# Altium PCB MGMEZZ04.PcbDoc (part 5 of 9)
Units mil, origin at the board's own origin, x right, y up, seen from the top; angles counter-clockwise.
Board outline 3790 x 5472.44 mil, 10 copper layers (TopLayer, InternalPlane1, MidLayer1, InternalPlane2, MidLayer2, MidLayer3, InternalPlane3, MidLayer4, InternalPlane4, BottomLayer), stack 57.08 mil thick; 846 components, 745 nets, 3323 pads, 1906 vias.
Unrouted connection lines stored in the file: 128.
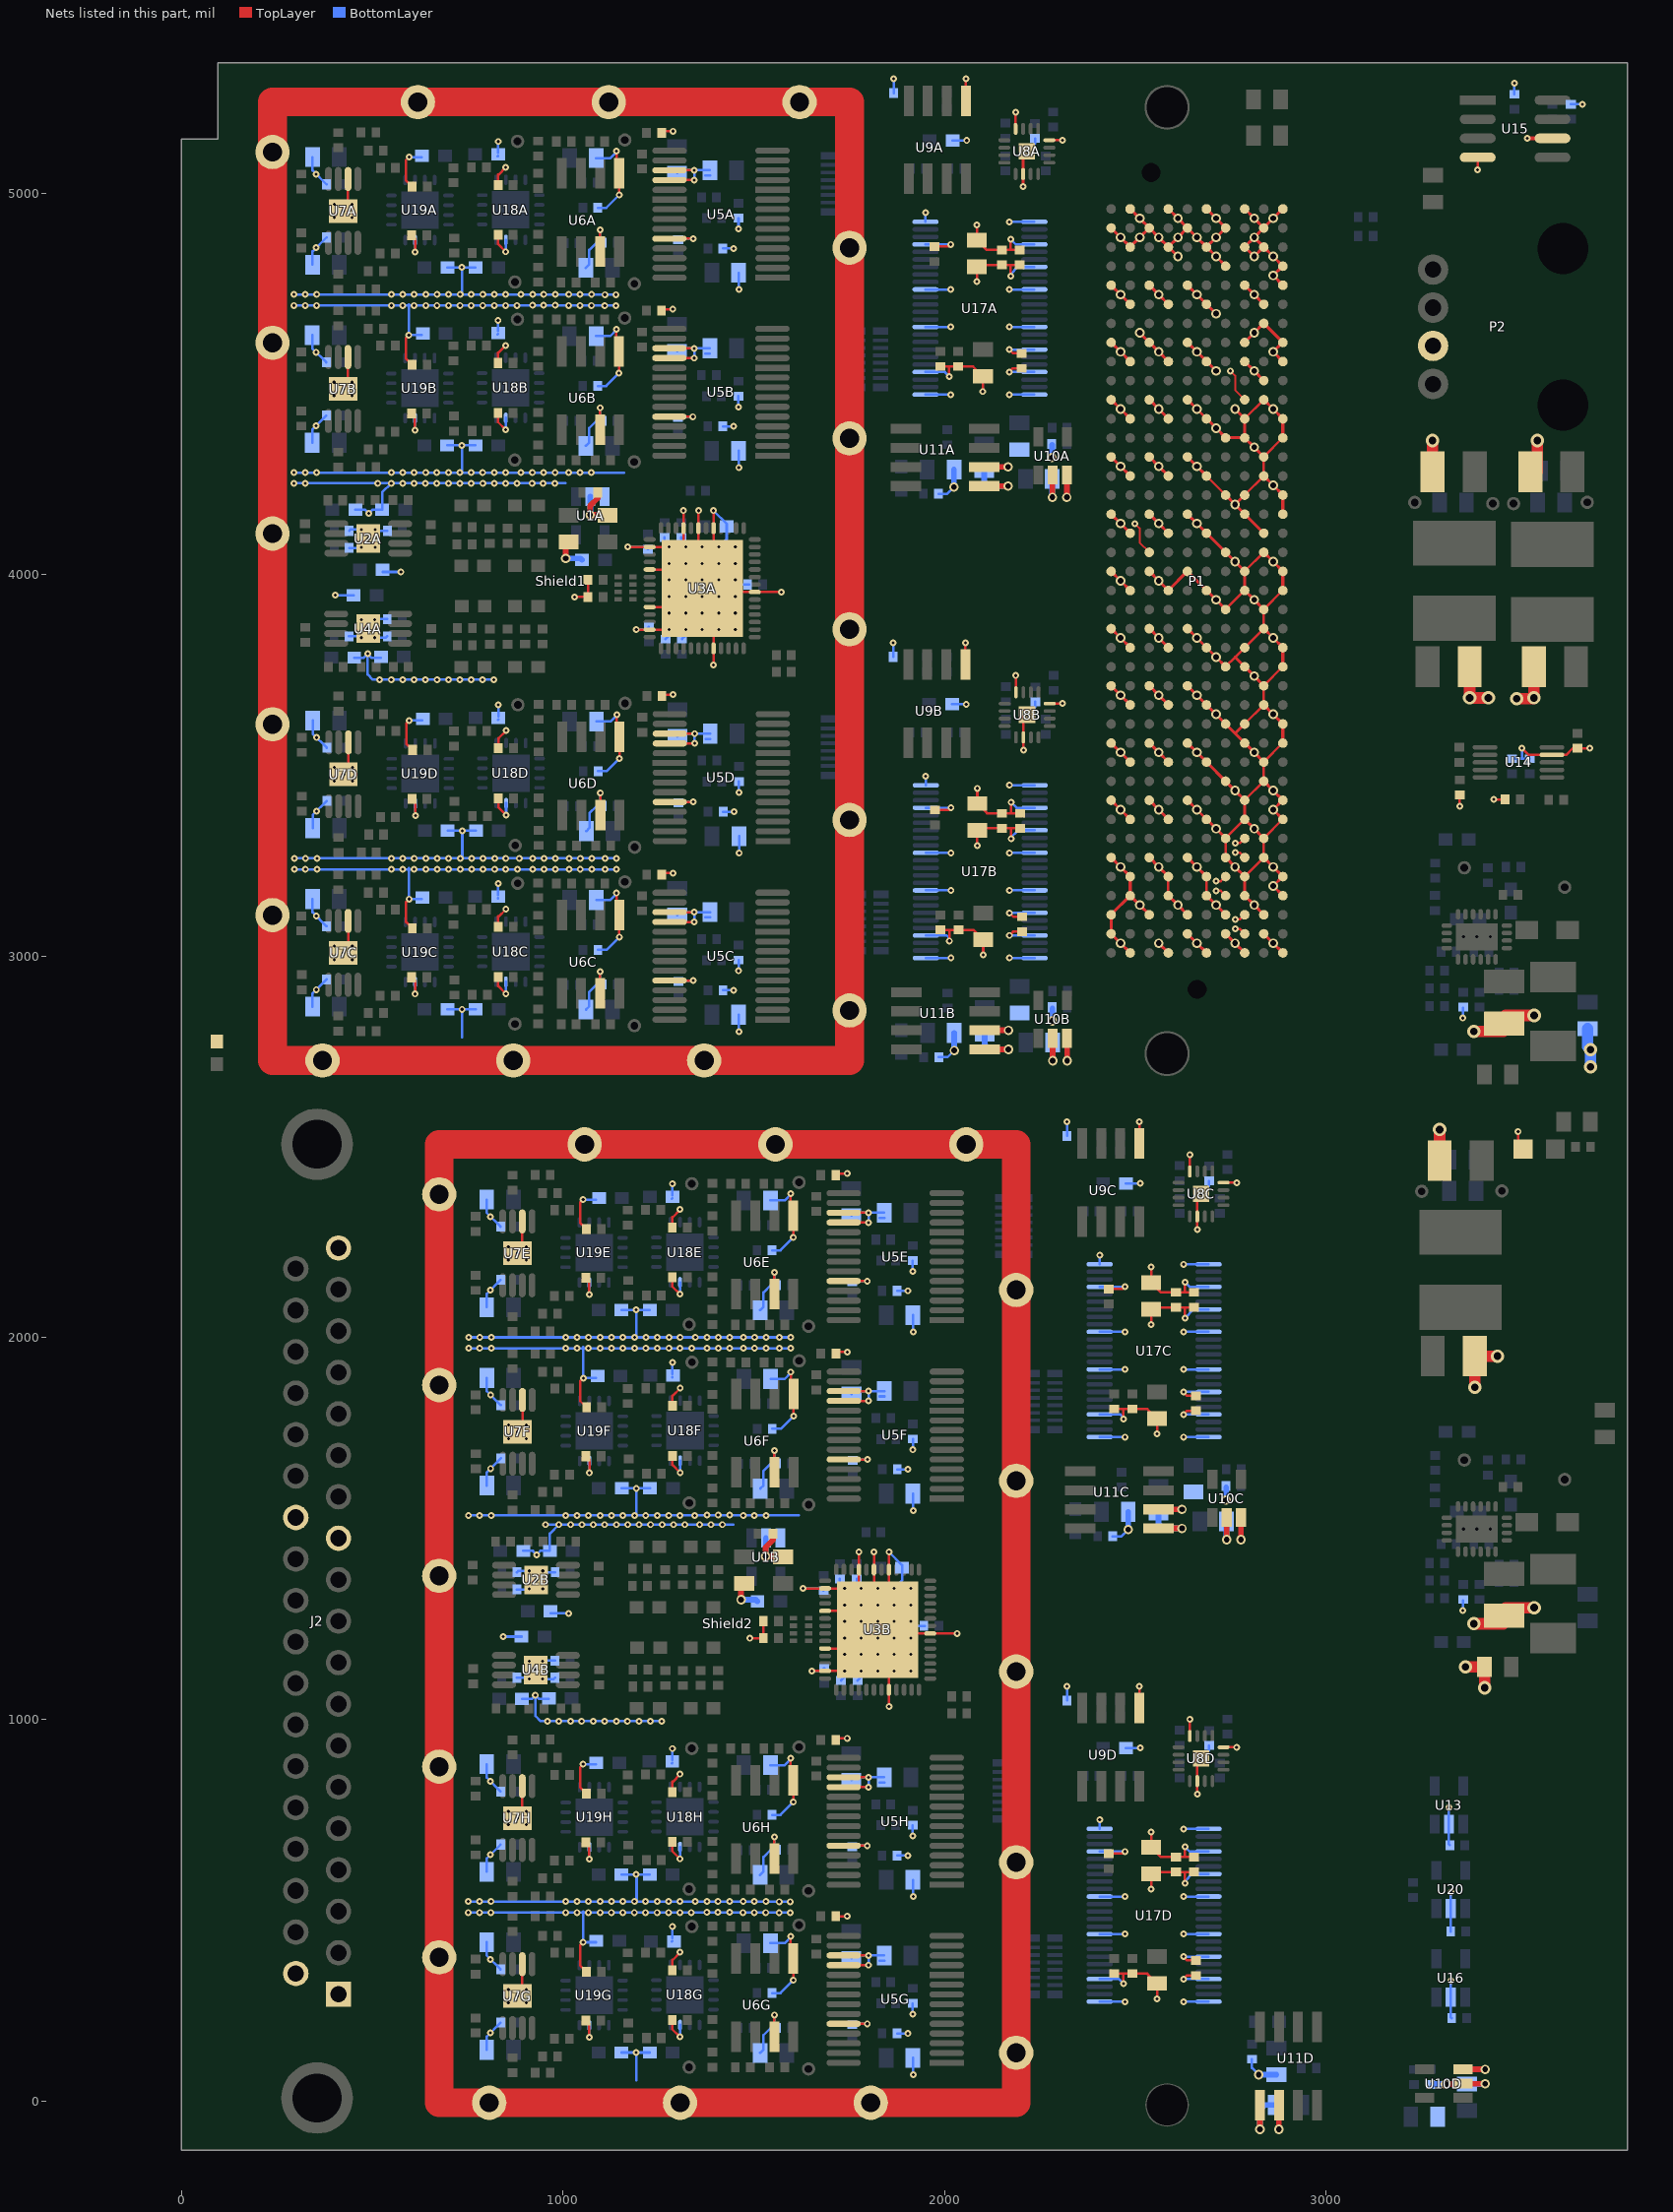
[diagram p13: the nets of this part, all layers, seen from the top]

## Via types
v1: diameter 18, hole 8, TopLayer to BottomLayer, 1296 vias
v2: diameter 18, hole 8, TopLayer to BottomLayer, tented both sides, 203 vias
v3: diameter 19.68, hole 7.87, TopLayer to BottomLayer, 188 vias
v4: diameter 25, hole 15, TopLayer to BottomLayer, tented both sides, 99 vias
v5: diameter 25, hole 15, TopLayer to BottomLayer, 72 vias
v6: diameter 35, hole 20, TopLayer to BottomLayer, 48 vias

## Nets (pads, with @x,y where several pads share a name; then routed paths per layer and width w, separated by ;. In a path a pad name is that pad's centre, name@x,y a point inside that pad or via, vN(x,y) a via of type N, cw(c..) or ccw(c..) an arc to the next point about the centre after c; other vN are vias at no path point) (continued)
GND: C1A.2 C1B.2 C2A.1 C2B.1 C3A.1 C3B.1 C4A.2 C4B.2 C5A.1 C5B.1 C6A.1 C6B.1 C7A.1 C7B.1 C9A.2 C9B.2 C10A.1 C10B.1 C11A.1 C11B.1 C12A.2 C12B.2 C13A.1 C13B.1 C14A.1 C14B.1 C15A.1 C15B.1 C16A.1 C16B.1 C17A.1 C17B.1 C19A.2 C19B.2 C23A.2 C23B.2 C24A.1 C24B.1 C28A.2 C28B.2 C29A.2 C29B.2 C30A.1 C30B.1 C32A.1 C32B.1 C33A.1 C33B.1 C34A.2 C34B.2 C35A.2 C35B.2 C40A.1 C40B.1 C40C.1 C40D.1 C40E.1 C40F.1 C40G.1 C40H.1 C43A.1 C43B.1 C43C.1 C43D.1 C43E.1 C43F.1 C43G.1 C43H.1 C44A.1 C44B.1 C44C.1 C44D.1 C44E.1 C44F.1 C44G.1 C44H.1 C45A.1 C45B.1 C45C.1 C45D.1 C45E.1 C45F.1 C45G.1 C45H.1 C46A.1 C46B.1 C46C.1 C46D.1 C46E.1 C46F.1 C46G.1 C46H.1 C47A.1 C47B.1 C47C.1 C47D.1 C47E.1 C47F.1 C47G.1 C47H.1 C48A.1 C48B.1 C48C.1 C48D.1 C48E.1 C48F.1 C48G.1 C48H.1 C49A.1 C49B.1 C49C.1 C49D.1 C49E.1 C49F.1 C49G.1 C49H.1 C50A.1 C50B.1 C50C.1 C50D.1 C50E.1 C50F.1 C50G.1 C50H.1 C51A.1 C51B.1 C51C.1 C51D.1 C52A.2 C52B.2 C52C.2 C52D.2 C53A.1 C53B.1 C53C.1 C53D.1 C54.1 C55A.1 C55B.1 C55C.1 C55D.1 C56A.2 C56B.2 C58.2 C59A.1 C59B.1 C60.2 C63.2 C72.1 C73.2 C77A.1 C77B.1 C77C.1 C77D.1 C78.2 C79.2 C80A.1 C80B.1 C80C.1 C80D.1 C80E.1 C80F.1 C80G.1 C80H.1 C81.2 C82.2 C83A.1 C83B.1 C83C.1 C83D.1 C83E.1 C83F.1 C83G.1 C83H.1 C84A.1 C84B.1 C84C.1 C84D.1 C85A.2 C85B.2 C85C.2 C85D.2 C86A.1 C86B.1 C86C.1 C86D.1 C87A.2 C87B.2 C87C.2 C87D.2 C88A.2 C88B.2 C88C.2 C88D.2 C88E.2 C88F.2 C88G.2 C88H.2 C89A.1 C89B.1 C89C.1 C89D.1 C89E.1 C89F.1 C89G.1 C89H.1 C90A.2 C90B.2 C90C.2 C90D.2 C90E.2 C90F.2 C90G.2 C90H.2 C91A.1 C91B.1 C91C.1 C91D.1 C91E.1 C91F.1 C91G.1 C91H.1 C92A.2 C92B.2 C92C.2 C92D.2 C92E.2 C92F.2 C92G.2 C92H.2 C93A.1 C93B.1 C93C.1 C93D.1 C93E.1 C93F.1 C93G.1 C93H.1 C94A.2 C94B.2 C94C.2 C94D.2 C94E.2 C94F.2 C94G.2 C94H.2 C95A.1 C95B.1 C95C.1 C95D.1 C95E.1 C95F.1 C95G.1 C95H.1 C96A.1 C96B.1 C96C.1 C96D.1 C96E.1 C96F.1 C96G.1 C96H.1 C97A.1 C97B.1 C97C.1 C97D.1 C97E.1 C97F.1 C97G.1 C97H.1 C98A.1 C98B.1 C98C.1 C98D.1 C98E.1 C98F.1 C98G.1 C98H.1 C99.2 C100.2 C101.2 C102A.1 C102B.1 C102C.1 C102D.1 C104.1 C110A.1 C110B.1 C110C.1 C110D.1 C114A.1 C114B.1 C114C.1 C114D.1 C115A.1 C115B.1 C115C.1 C115D.1 C116A.1 C116B.1 C116C.1 C116D.1 C117A.1 C117B.1 C117C.1 C117D.1 DP1.2 J2.1 J2.12 J2.19 J2.20 J2.31 P1.A1 P1.A4 P1.A5 P1.A8 P1.A9 P1.A12 P1.A13 P1.A16 P1.A17 P1.A20 P1.A21 P1.A24 P1.A25 P1.A28 P1.A29 P1.A32 P1.A33 P1.A36 P1.A37 P1.A40 P1.B2 P1.B3 P1.B6 P1.B7 P1.B10 P1.B11 P1.B14 P1.B15 P1.B18 P1.B19 P1.B22 P1.B23 P1.B26 P1.B27 P1.B30 P1.B31 P1.B34 P1.B35 P1.B38 P1.B39 P1.C1 P1.C4 P1.C5 P1.C8 P1.C9 P1.C12 P1.C13 P1.C16 P1.C17 P1.C20 P1.C21 P1.C24 P1.C25 P1.C28 P1.C29 P1.C32 P1.C33 P1.C36 P1.C38 P1.C40 P1.D2 P1.D3 P1.D6 P1.D7 P1.D10 P1.D13 P1.D16 P1.D19 P1.D22 P1.D25 P1.D28 P1.D37 P1.D39 P1.E1 P1.E4 P1.E5 P1.E8 P1.E11 P1.E14 P1.E17 P1.E20 P1.E23 P1.E26 P1.E29 P1.E32 P1.E35 P1.E38 P1.E40 P1.F2 P1.F3 P1.F6 P1.F9 P1.F12 P1.F15 P1.F18 P1.F21 P1.F24 P1.F27 P1.F30 P1.F33 P1.F36 P1.F39 P1.G1 P1.G4 P1.G5 P1.G8 P1.G11 P1.G14 P1.G17 P1.G20 P1.G23 P1.G26 P1.G29 P1.G32 P1.G35 P1.G38 P1.G40 P1.H3 P1.H6 P1.H9 P1.H12 P1.H15 P1.H18 P1.H21 P1.H24 P1.H27 P1.H30 P1.H33 P1.H36 P1.H39 P1.J1 P1.J4 P1.J5 P1.J8 P1.J11 P1.J14 P1.J17 P1.J20 P1.J23 P1.J26 P1.J29 P1.J32 P1.J35 P1.J38 P1.J40 P1.K2 P1.K3 P1.K6 P1.K9 P1.K12 P1.K15 P1.K18 P1.K21 P1.K24 P1.K27 P1.K30 P1.K33 P1.K36 P1.K39 P2.3 R25.2 R28A.1 R28B.1 R28C.1 R28D.1 R34A.1 R34B.1 R34C.1 R34D.1 R34E.1 R34F.1 R34G.1 R34H.1 R40A.1 R40B.1 R40C.1 R40D.1 R49B.2 R51A.1 R55.1 R68.2 Shield1.0 Shield2.0 U1A.2 U1B.2 U2A.9 U2B.9 U3A.2 U3A.5 U3A.10 U3A.13 U3A.22 U3A.33 U3A.45 U3A.47 U3A.49 U3A.53 U3B.2 U3B.5 U3B.10 U3B.13 U3B.22 U3B.33 U3B.45 U3B.47 U3B.49 U3B.53 U4A.9 U4B.9 U5A.17 U5A.18 U5A.24 U5B.17 U5B.18 U5B.24 U5C.17 U5C.18 U5C.24 U5D.17 U5D.18 U5D.24 U5E.17 U5E.18 U5E.24 U5F.17 U5F.18 U5F.24 U5G.17 U5G.18 U5G.24 U5H.17 U5H.18 U5H.24 U6A.3 U6A.5 U6B.3 U6B.5 U6C.3 U6C.5 U6D.3 U6D.5 U6E.3 U6E.5 U6F.3 U6F.5 U6G.3 U6G.5 U6H.3 U6H.5 U7A.2 U7A.9 U7B.2 U7B.9 U7C.2 U7C.9 U7D.2 U7D.9 U7E.2 U7E.9 U7F.2 U7F.9 U7G.2 U7G.9 U7H.2 U7H.9 U8A.6 U8A.17 U8B.6 U8B.17 U8C.6 U8C.17 U8D.6 U8D.17 U9A.5 U9B.5 U9C.5 U9D.5 U10A.2 U10B.2 U10C.2 U10D.2 U11A.5 U11B.5 U11C.5 U11D.5 U13.2 U14.4 U15.4 U16.2 U17A.4 U17A.10 U17A.15 U17A.21 U17A.25 U17A.28 U17A.34 U17A.39 U17A.45 U17A.48 U17B.4 U17B.10 U17B.15 U17B.21 U17B.25 U17B.28 U17B.34 U17B.39 U17B.45 U17B.48 U17C.4 U17C.10 U17C.15 U17C.21 U17C.25 U17C.28 U17C.34 U17C.39 U17C.45 U17C.48 U17D.4 U17D.10 U17D.15 U17D.21 U17D.25 U17D.28 U17D.34 U17D.39 U17D.45 U17D.48 U18A.3 U18B.3 U18C.3 U18D.3 U18E.3 U18F.3 U18G.3 U18H.3 U19A.3 U19B.3 U19C.3 U19D.3 U19E.3 U19F.3 U19G.3 U19H.3 U20.2 | length 48037.1
  TopLayer w6.5: v3(423.86,4486.99) 436.66,4499.78 U7B.2@436.66,4570.65 ; v3(424.11,4953.65) 436.9,4966.44 U7A.2@436.9,5037.31 ; v3(424.31,3009.02) 437.11,3021.81 U7C.2@437.11,3092.68 ; v3(424.92,3476.99) 437.72,3489.78 U7D.2@437.72,3560.65 ; v1(596.25,4627.99) 588.27,4620 588.27,4567.58 C93B.1@604.86,4550.99 ; v1(596.5,5094.65) 588.51,5086.66 588.51,5034.25 C93A.1@605.11,5017.65 ; v1(596.7,3150.02) 588.71,3142.03 588.71,3089.62 C93C.1@605.31,3073.02 ; v1(597.31,3617.99) 589.33,3610 589.33,3557.58 C93D.1@605.92,3540.99 ; C95B.1@603.41,4422.99 612.27,4414.13 v1@612.27,4383.19 ; C95A.1@603.65,4889.65 612.51,4880.79 v1@612.51,4849.85 ; C95C.1@603.85,2945.02 612.71,2936.16 v1@612.71,2905.22 ; C95D.1@604.47,3412.99 613.33,3404.13 v1@613.33,3373.19 ; C91B.1@829.86,4423.99 829.86,4400.19 v1(850.07,4379.99) ; C89B.1@829.86,4554.99 829.86,4582.25 831.33,4582.25 v1(850.07,4600.99) ; C91A.1@830.11,4890.65 830.11,4866.85 v1(850.31,4846.65) ; C89A.1@830.11,5021.65 830.11,5048.91 831.58,5048.91 v1(850.31,5067.65) ; C91C.1@830.31,2946.02 830.31,2922.22 v1(850.51,2902.02) ; C89C.1@830.31,3077.02 830.31,3104.28 831.78,3104.28 v1@850.51,3123.02 ; C91D.1@830.92,3413.99 830.92,3390.19 v1(851.13,3369.99) ; C89D.1@830.92,3544.99 830.92,3572.25 832.39,3572.25 v1@851.13,3590.99 ; v3(880.61,274.63) 893.41,287.43 U7G.2@893.41,358.29 ; v3(880.61,741.34) 893.41,754.13 U7H.2@893.41,825 ; v3(880.61,2221.34) 893.41,2234.13 U7E.2@893.41,2305 ; v3(881,1753.63) 893.8,1766.43 U7F.2@893.8,1837.29 ; v1(1030,3942) 1065.69,3942 C33A.1@1065.74,3942.05 C32A.1@1065.74,3987.05 ; v1(1053,415.63) 1045.02,407.65 1045.02,355.23 C93G.1@1061.61,338.63 ; v1(1053,882.34) 1045.02,874.35 1045.02,821.94 C93H.1@1061.61,805.34 ; v1(1053,2362.34) 1045.02,2354.35 1045.02,2301.94 C93E.1@1061.61,2285.34 ; v1(1053.39,1894.63) 1045.4,1886.65 1045.4,1834.23 C93F.1@1062,1817.63 ; C95G.1@1060.16,210.63 1069.02,201.77 v1@1069.02,170.83 ; C95H.1@1060.16,677.34 1069.02,668.48 v1@1069.02,637.54 ; C95E.1@1060.16,2157.34 1069.02,2148.48 v1@1069.02,2117.54 ; C95F.1@1060.54,1689.63 1069.4,1680.77 v1@1069.4,1649.83 ; U6B.3@1097.08,4380.62 v1(1097.08,4437.63) ; U6A.3@1097.32,4847.29 v1(1097.32,4904.29) ; U6C.3@1097.52,2902.66 v1(1097.52,2959.66) ; U6D.3@1098.14,3370.62 v1(1098.14,3427.63) ; v1(1140.08,4643.63) 1140.08,4592.62 U6B.5@1147.08,4585.62 v1(1147.08,4528.62) ; v1(1140.32,5110.29) 1140.32,5059.29 U6A.5@1147.32,5052.29 v1(1147.32,4995.28) ; v1(1140.52,3165.66) 1140.52,3114.66 U6C.5@1147.52,3107.66 v1(1147.52,3050.65) ; v1(1141.14,3633.63) 1141.14,3582.62 U6D.5@1148.14,3575.62 v1(1148.14,3518.62) ; v1(1169.31,4072.87) U3A.2@1227.28,4072.87 v3(1278.46,4072.87) ; v1(1192.31,3856.33) U3A.13@1227.28,3856.33 v3(1278.46,3856.33) ; U3A.10@1227.28,3915.39 1315.86,3915.39 U3A.53@1365.08,3964.6 U3A.53@1355.23,3974.44 ; U3A.5@1227.28,4013.81 U3A.53@1315.86,4013.81 ; C97B.1@1258.23,4695.99 v1(1287.86,4695.99) ; C97A.1@1258.48,5162.65 v1(1288.11,5162.65) ; C97C.1@1258.68,3218.02 v1(1288.31,3218.02) ; C97D.1@1259.29,3685.99 v1(1288.92,3685.99) ; U5B.24@1278.86,4414.39 v1(1340.69,4414.39) ; U5B.18@1278.86,4567.99 v1(1344.03,4567.99) ; U5B.17@1278.86,4593.59 v1(1344.03,4593.59) ; U5A.24@1279.11,4881.05 v1(1340.94,4881.05) ; U5A.18@1279.11,5034.65 v1(1344.28,5034.65) ; U5A.17@1279.11,5060.25 v1(1344.28,5060.25) ; U5C.24@1279.31,2936.42 v1(1341.14,2936.42) ; U5C.18@1279.31,3090.02 v1(1344.48,3090.02) ; U5C.17@1279.31,3115.62 v1(1344.48,3115.62) ; U5D.24@1279.92,3404.39 v1(1341.75,3404.39) ; U5D.18@1279.92,3557.99 v1(1345.09,3557.99) ; U5D.17@1279.92,3583.59 v1(1345.09,3583.59) ; C91G.1@1286.61,211.63 1286.61,187.83 v1(1306.82,167.63) ; C89G.1@1286.61,342.63 1286.61,369.89 1288.08,369.89 v1@1306.82,388.63 ; C91H.1@1286.61,678.34 1286.61,654.54 v1(1306.82,634.34) ; C89H.1@1286.61,809.34 1286.61,836.6 1288.08,836.6 v1@1306.82,855.34 ; C91E.1@1286.61,2158.34 1286.61,2134.54 v1(1306.82,2114.34) ; C89E.1@1286.61,2289.34 1286.61,2316.6 1288.08,2316.6 v1@1306.82,2335.34 ; C91F.1@1287,1690.63 1287,1666.83 v1(1307.2,1646.63) ; C89F.1@1287,1821.63 1287,1848.89 1288.47,1848.89 v1@1307.2,1867.63 ; v1(1315.86,4168.05) U3A.49@1315.86,4122.08 U3A.53@1315.86,4013.81 ; v1(1355.23,4168.05) U3A.47@1355.23,4122.08 U3A.53@1355.23,3974.44 ; U3A.53@1374.92,3954.76 U3A.33@1502.87,3954.76 ; v1(1394.6,3763.15) U3A.53@1394.6,3935.07 ; U3A.53@1394.6,3994.13 U3A.45@1394.6,4122.08 v1(1394.6,4168.05) ; v1(1489.69,1212.35) C33B.1@1525.43,1212.4 C33B.1@1525.43,1212.4 C32B.1@1525.43,1257.4 ; U3A.33@1501,3954.76 v1(1572.84,3954.76) ; U6G.3@1553.83,168.27 v1(1553.83,225.27) ; U6H.3@1553.83,634.98 v1(1553.83,691.98) ; U6E.3@1553.83,2114.98 v1(1553.83,2171.98) ; U6F.3@1554.21,1647.27 v1(1554.21,1704.27) ; v1(1596.83,431.27) 1596.83,380.27 U6G.5@1603.83,373.27 v1(1603.83,316.26) ; v1(1596.83,897.98) 1596.83,846.98 U6H.5@1603.83,839.98 v1(1603.83,782.97) ; v1(1596.83,2377.98) 1596.83,2326.98 U6E.5@1603.83,2319.98 v1(1603.83,2262.97) ; v1(1597.21,1910.27) 1597.21,1859.27 U6F.5@1604.21,1852.27 v1(1604.21,1795.26) ; v1(1629,1343.22) v3(1738.15,1343.22) ; v1(1652,1126.68) v3(1738.15,1126.68) ; U3B.10@1686.97,1185.74 1775.55,1185.74 U3B.53@1824.77,1234.95 U3B.53@1814.92,1244.8 ; U3B.5@1686.97,1284.17 U3B.53@1775.55,1284.17 ; C97G.1@1714.98,483.63 v1(1744.61,483.63) ; C97H.1@1714.98,950.34 v1(1744.61,950.34) ; C97E.1@1714.98,2430.34 v1(1744.61,2430.34) ; C97F.1@1715.37,1962.63 v1(1745,1962.63) ; U5G.24@1735.61,202.03 v1(1797.44,202.03) ; U5G.18@1735.61,355.63 v1(1800.78,355.63) ; U5G.17@1735.61,381.23 v1(1800.78,381.23) ; U5H.24@1735.61,668.74 v1(1797.44,668.74) ; U5H.18@1735.61,822.34 v1(1800.78,822.34) ; U5H.17@1735.61,847.94 v1(1800.78,847.94) ; U5E.24@1735.61,2148.74 v1(1797.44,2148.74) ; U5E.18@1735.61,2302.34 v1(1800.78,2302.34) ; U5E.17@1735.61,2327.94 v1(1800.78,2327.94) ; U5F.24@1736,1681.03 v1(1797.83,1681.03) ; U5F.18@1736,1834.63 v1(1801.17,1834.63) ; U5F.17@1736,1860.23 v1(1801.17,1860.23) ; v1(1775.55,1438.4) U3B.53@1775.55,1284.17 ; v1(1814.92,1438.4) U3B.53@1814.92,1244.8 ; U3B.53@1834.61,1225.11 U3B.33@1962.56,1225.11 ; v1@1854.29,1037.5 U3B.53@1854.29,1205.43 ; U3B.53@1854.29,1264.48 v1(1854.29,1438.4) ; U3B.33@1960.69,1225.11 v1(2032.53,1225.11) ; C84A.1@1973.96,4860.22 2010.28,4860.22 v1(2016,4865.94) ; C84B.1@1974.77,3383.56 2011.09,3383.56 v1(2016.81,3389.28) ; C86A.1@1988.5,4545.85 2012,4545.85 ; C86B.1@1989.32,3069.19 2012.82,3069.19 ; v1@2012,4524 2012,4545.85 ; v1@2012.82,3047.34 2012.82,3069.19 ; U9B.5@2054.71,3764.89 v1(2054.71,3821.95) ; U9A.5@2056.01,5242.6 v1(2056.01,5299.66) ; v1@2085,4913 2085,4877.1 C114A.1@2084.93,4877.02 2110.56,4851.39 C115A.1@2149.93,4851.39 2173.43,4851.39 ; v1@2085.81,3436.34 C114B.1@2085.74,3400.36 C114B.1@2085.74,3400.36 2111.37,3374.73 C115B.1@2150.74,3374.73 2174.24,3374.73 ; v1@2100.43,4484.24 2100.5,4484.32 C116A.1@2100.5,4520.22 2074.87,4545.85 C117A.1@2035.5,4545.85 2012,4545.85 ; v1@2101.25,3007.58 2101.32,3007.65 C116B.1@2101.32,3043.56 2075.69,3069.19 C117B.1@2036.32,3069.19 2012.82,3069.19 ; v1(2169.43,4531.3) 2179.13,4541 C87A.2@2202,4541 ; v1(2170.25,3054.64) 2179.95,3064.34 C87B.2@2202.81,3064.34 ; v1(2173.43,4879.24) 2173.43,4851.4 ; v1@2174.25,3399.58 2174.25,3374.74 ; C85A.2@2196.93,4851.39 2173.43,4851.39 ; C85B.2@2197.75,3374.73 2174.24,3374.73 ; v1(2205.8,5017.58) U8A.6@2205.8,5050.52 2205.8,5099.73 v3(2215.64,5109.57) ; v1(2206.61,3539.92) U8B.6@2206.61,3573.86 2206.61,3623.07 v3(2216.45,3632.91) ; C84D.1@2430.46,647.91 2466.78,647.91 v1(2472.5,653.64) ; C84C.1@2430.46,2127.91 2466.78,2127.91 v1(2472.5,2133.64) ; C86D.1@2445.01,333.54 2468.51,333.54 ; C86C.1@2445.01,1813.54 2468.51,1813.54 ; v1(2468.5,307.69) 2468.5,333.54 ; v1(2468.5,1786.69) 2468.5,1813.54 ; U9D.5@2510.4,1029.24 v1(2510.4,1086.31) ; U9C.5@2510.4,2509.24 v1(2510.4,2566.31) ; v1@2541.5,700.69 2541.5,664.79 C114D.1@2541.43,664.71 2567.06,639.08 C115D.1@2606.43,639.08 2629.93,639.08 ; v1@2541.5,2180.69 2541.43,2180.62 C114C.1@2541.43,2144.71 2567.06,2119.08 C115C.1@2606.43,2119.08 2629.93,2119.08 ; v1@2556.94,271.93 2557.01,272.01 C116D.1@2557.01,307.91 2531.38,333.54 C117D.1@2492.01,333.54 2468.51,333.54 ; v1@2556.94,1751.93 2557.01,1752.01 C116C.1@2557.01,1787.91 2531.38,1813.54 C117C.1@2492.01,1813.54 2468.51,1813.54 ; P1.G4@2586.34,3159.33 P1.G5@2586.34,3209.33 ; v1(2625.94,318.99) 2635.64,328.69 C87D.2@2658.5,328.69 ; v1(2625.94,1798.99) 2635.64,1808.69 C87C.2@2658.5,1808.69 ; v1(2629.94,665.93) 2629.94,639.09 ; v1(2629.94,2145.93) 2629.94,2119.09 ; C85D.2@2653.44,639.08 2629.93,639.08 ; C85C.2@2653.44,2119.08 2629.93,2119.08 ; v1(2662.3,804.27) U8D.6@2662.3,838.21 2662.3,887.42 v3(2672.14,897.26) ; v1(2662.3,2284.27) U8C.6@2662.3,2318.21 2662.3,2367.42 v3(2672.14,2377.26) ; P1.E4@2686.34,3159.33 P1.E5@2686.34,3209.33 ; P1.E26@2686.34,4259.33 P1.D25@2736.34,4209.33 ; P1.D6@2736.34,3259.33 2736.34,3309.33 2786.34,3359.33 2786.34,3409.33 2836.34,3459.33 2836.34,3509.33 P1.A12@2886.34,3559.33 ; P1.D16@2736.34,3759.33 2761.34,3784.33 2836.34,3859.33 2836.34,3909.33 P1.A20@2886.34,3959.33 ; P1.D19@2736.34,3909.33 2786.34,3959.33 2786.34,4009.33 P1.B22@2836.34,4059.33 ; P1.C4@2786.34,3159.33 2786.34,3209.33 2836.34,3259.33 2836.34,3309.33 P1.A8@2886.34,3359.33 ; P1.C13@2786.34,3609.33 2836.34,3659.33 2836.34,3709.33 P1.A16@2886.34,3759.33 ; P1.C25@2786.34,4209.33 2836.34,4259.33 2836.34,4309.33 P1.A28@2886.34,4359.33 ; P1.C28@2786.34,4359.33 2786.34,4409.33 P1.B30@2836.34,4459.33 ; v1(3349.98,3393.44) C73.2@3349.98,3422.87 ; v1(3397,5061) U15.4@3397,5094 ; v1(3439.56,3411.24) C54.1@3468.99,3411.24 ; DP1.2@3503,2501.22 v1(3503,2540) ; v1(3513,3545.2) 3530.27,3527.93 U14.4@3591.58,3527.93 3628.93,3527.93 3646.2,3545.2 C72.1@3658,3545.2 v1(3690.43,3545.2) ; U3A.53@1315.86,4013.81 U3A.53@1355.23,3974.44 ; U3B.53@1775.55,1284.17 U3B.53@1814.92,1244.8
  TopLayer w8: P1.K6@2436.34,3259.33 v4(2461.34,3234.33) 2486.34,3209.33 P1.J4@2486.34,3159.33 ; P1.K9@2436.34,3409.33 v4(2461.34,3384.33) P1.J8@2486.34,3359.33 ; P1.K12@2436.34,3559.33 v4(2461.34,3534.33) P1.J11@2486.34,3509.33 ; P1.K15@2436.34,3709.33 v4(2461.34,3684.33) P1.J14@2486.34,3659.33 ; P1.K18@2436.34,3859.33 v4(2461.34,3834.33) P1.J17@2486.34,3809.33 ; P1.K21@2436.34,4009.33 v4(2461.34,3984.33) P1.J20@2486.34,3959.33 ; P1.K24@2436.34,4159.33 v4(2461.34,4134.33) P1.J23@2486.34,4109.33 ; P1.K27@2436.34,4309.33 v4(2461.34,4284.33) P1.J26@2486.34,4259.33 ; P1.K30@2436.34,4459.33 v4(2461.34,4434.33) P1.J29@2486.34,4409.33 ; P1.K33@2436.34,4609.33 v4(2461.34,4584.33) P1.J32@2486.34,4559.33 ; P1.K36@2436.34,4759.33 v4(2461.34,4734.33) P1.J35@2486.34,4709.33 ; P1.K39@2436.34,4909.33 v4(2461.34,4884.33) 2486.34,4859.33 v4(2511.34,4884.33) P1.H39@2536.34,4909.33 ; P1.J1@2486.34,3009.33 v4(2461.34,3034.33) 2436.34,3059.33 2436.34,3109.33 P1.J4@2486.34,3159.33 ; P1.J40@2486.34,4959.33 v4(2511.34,4934.33) P1.H39@2536.34,4909.33 ; v4(2511.34,4634.33) v4(2561.34,4584.33) P1.G32@2586.34,4559.33 ; P1.H3@2536.34,3109.33 v4(2511.34,3134.33) P1.J4@2486.34,3159.33 ; P1.H6@2536.34,3259.33 v4(2561.34,3234.33) P1.G5@2586.34,3209.33 ; P1.H9@2536.34,3409.33 v4(2561.34,3384.33) P1.G8@2586.34,3359.33 ; P1.H12@2536.34,3559.33 v4(2561.34,3534.33) P1.G11@2586.34,3509.33 ; P1.H15@2536.34,3709.33 v4(2561.34,3684.33) P1.G14@2586.34,3659.33 ; P1.H18@2536.34,3859.33 v4(2561.34,3834.33) P1.G17@2586.34,3809.33 ; P1.H21@2536.34,4009.33 v4(2561.34,3984.33) 2586.34,3959.33 2636.34,4009.33 v4(2711.34,3934.33) P1.D19@2736.34,3909.33 ; P1.H24@2536.34,4159.33 v4(2561.34,4134.33) P1.G23@2586.34,4109.33 ; P1.H27@2536.34,4309.33 v4(2561.34,4284.33) P1.G26@2586.34,4259.33 ; P1.H30@2536.34,4459.33 v4(2561.34,4434.33) P1.G29@2586.34,4409.33 ; P1.H36@2536.34,4759.33 v4(2561.34,4734.33) P1.G35@2586.34,4709.33 ; v4(2561.34,3034.33) P1.G1@2586.34,3009.33 ; P1.G4@2586.34,3159.33 v4(2611.34,3134.33) P1.F3@2636.34,3109.33 ; P1.G40@2586.34,4959.33 v4(2611.34,4934.33) P1.F39@2636.34,4909.33 ; v4(2611.34,4834.33) P1.G38@2586.34,4859.33 ; P1.F2@2636.34,3059.33 v4(2661.34,3034.33) P1.E1@2686.34,3009.33 ; P1.F6@2636.34,3259.33 v4(2661.34,3234.33) P1.E5@2686.34,3209.33 ; P1.F9@2636.34,3409.33 v4(2661.34,3384.33) v4(2711.34,3334.33) P1.D7@2736.34,3309.33 ; P1.F12@2636.34,3559.33 v4(2661.34,3534.33) v4(2761.34,3434.33) P1.C9@2786.34,3409.33 ; P1.F15@2636.34,3709.33 v4(2661.34,3684.33) v4(2711.34,3634.33) 2761.34,3584.33 ; P1.F18@2636.34,3859.33 v4(2661.34,3834.33) v4(2711.34,3784.33) P1.D16@2736.34,3759.33 ; P1.F24@2636.34,4159.33 v4(2661.34,4134.33) v4(2761.34,4034.33) P1.C21@2786.34,4009.33 ; P1.F27@2636.34,4309.33 v4(2661.34,4284.33) P1.E26@2686.34,4259.33 ; P1.F30@2636.34,4459.33 v4(2661.34,4434.33) v4(2711.34,4384.33) 2736.34,4359.33 2786.34,4359.33 v4(2811.34,4334.33) P1.B27@2836.34,4309.33 ; P1.F33@2636.34,4609.33 v4(2661.34,4584.33) v4(2711.34,4534.33) ; P1.F36@2636.34,4759.33 v4(2661.34,4734.33) v4(2711.34,4684.33) ; P1.E4@2686.34,3159.33 v4(2711.34,3134.33) P1.D3@2736.34,3109.33 ; P1.E40@2686.34,4959.33 v4(2711.34,4934.33) 2736.34,4909.33 v4(2711.34,4884.33) P1.E38@2686.34,4859.33 ; P1.D2@2736.34,3059.33 v4(2761.34,3034.33) P1.C1@2786.34,3009.33 ; P1.D6@2736.34,3259.33 v4(2761.34,3234.33) P1.C5@2786.34,3209.33 ; P1.D25@2736.34,4209.33 v4(2761.34,4184.33) ; P1.D37@2736.34,4809.33 v4(2711.34,4834.33) P1.E38@2686.34,4859.33 ; 2761.34,3784.33 v4(2811.34,3734.33) P1.B15@2836.34,3709.33 ; v4(2761.34,4434.33) P1.C29@2786.34,4409.33 ; P1.C4@2786.34,3159.33 v4(2811.34,3134.33) P1.B3@2836.34,3109.33 ; P1.C8@2786.34,3359.33 v4(2811.34,3334.33) P1.B7@2836.34,3309.33 ; P1.C13@2786.34,3609.33 2761.34,3584.33 ; P1.C20@2786.34,3959.33 v4(2811.34,3934.33) P1.B19@2836.34,3909.33 ; P1.C25@2786.34,4209.33 v4(2761.34,4184.33) ; P1.C32@2786.34,4559.33 v4(2811.34,4534.33) P1.B31@2836.34,4509.33 ; P1.C33@2786.34,4609.33 v4(2811.34,4634.33) 2836.34,4659.33 2886.34,4609.33 v4(2861.34,4584.33) P1.A32@2886.34,4559.33 ; P1.C36@2786.34,4759.33 v4(2811.34,4734.33) P1.B35@2836.34,4709.33 ; P1.C40@2786.34,4959.33 v4(2811.34,4934.33) P1.B39@2836.34,4909.33 ; P1.B2@2836.34,3059.33 v4(2861.34,3034.33) P1.A1@2886.34,3009.33 ; P1.B6@2836.34,3259.33 v4(2861.34,3234.33) 2886.34,3209.33 v4(2861.34,3184.33) P1.A4@2886.34,3159.33 ; P1.B10@2836.34,3459.33 v4(2861.34,3434.33) 2886.34,3409.33 v4(2861.34,3384.33) P1.A8@2886.34,3359.33 ; P1.B11@2836.34,3509.33 v4(2811.34,3534.33) 2761.34,3584.33 ; P1.B14@2836.34,3659.33 v4(2861.34,3634.33) 2886.34,3609.33 P1.A12@2886.34,3559.33 ; P1.B18@2836.34,3859.33 v4(2861.34,3834.33) 2886.34,3809.33 P1.A16@2886.34,3759.33 ; P1.B22@2836.34,4059.33 v4(2861.34,4034.33) 2886.34,4009.33 P1.A20@2886.34,3959.33 ; P1.B23@2836.34,4109.33 v4(2761.34,4184.33) ; P1.B26@2836.34,4259.33 v4(2861.34,4234.33) 2886.34,4209.33 P1.A24@2886.34,4159.33 ; P1.B30@2836.34,4459.33 v4(2861.34,4434.33) 2886.34,4409.33 P1.A28@2886.34,4359.33 ; P1.A36@2886.34,4759.33 v4(2861.34,4784.33) 2886.34,4809.33 v4(2861.34,4834.33) P1.B38@2836.34,4859.33 ; P1.A40@2886.34,4959.33 v4(2861.34,4934.33) P1.B39@2836.34,4909.33 ; P1.H39@2536.34,4909.33 v4(2561.34,4884.33) P1.G38@2586.34,4859.33 ; P1.G38@2586.34,4859.33 v4(2611.34,4884.33) P1.F39@2636.34,4909.33 ; P1.F39@2636.34,4909.33 v4(2661.34,4884.33) P1.E38@2686.34,4859.33 ; v4(2811.34,4884.33) P1.B38@2836.34,4859.33 ; v4(2811.34,4884.33) P1.B39@2836.34,4909.33 ; v4(2811.34,4884.33) 2786.34,4859.33 v4(2811.34,4834.33) P1.B38@2836.34,4859.33
  TopLayer w15: v5(1007.11,4043.05) C5A.1@1007.11,4088.05 ; C7A.1@1091.11,4215.77 1091.11,4200.77 1071.11,4180.77 v5(1071.11,4156.77) 1116.11,4156.77 C13A.1@1117.11,4155.77 ; v5(1466.8,1313.4) C5B.1@1466.8,1358.4 ; C7B.1@1550.8,1486.12 1550.8,1471.12 1530.8,1451.12 v5(1530.8,1427.12) 1575.8,1427.12 C13B.1@1576.8,1426.12 ; U11A.5@2104.38,4232.62 v5(2166.61,4232.62) ; U11B.5@2105.19,2755.95 v5(2167.43,2755.95) ; v5(2282.78,4203.18) U10A.2@2282.78,4261.42 ; v5(2283.59,2726.52) U10B.2@2283.59,2784.76 ; U11C.5@2560.88,1500.31 v5@2619.12,1500.31 ; v5(2739.28,1470.87) U10C.2@2739.28,1529.11 ; v5(2826.14,-74.54) U11D.5@2826.14,-11.31 ; v5@3313.47,43.84 3357.26,43.84 U10D.2@3358.39,44.97 v5(3416.63,44.97)
  TopLayer w30: C100.2@3278.76,4270 v6(3278.76,4351.88) ; C78.2@3297.26,2464 v6(3297.26,2545.88) ; v6(3365,1137.62) R49B.2@3415,1137.62 v6(3415,1082.62) ; C101.2@3376,3759.14 v6(3376,3677.26) v6(3425,3677.26) ; v6(3387,1250.48) 3464.5,1250.48 3465.99,1251.97 C56B.2@3465.99,1271.39 3465.99,1288.61 3470,1292.62 v6(3545,1292.62) ; v6(3387,2802.86) 3464.5,2802.86 3465.99,2804.35 C56A.2@3465.99,2823.77 3465.99,2840.99 3470,2845 v6(3545,2845) ; v6(3389.5,1870.12) C79.2@3389.5,1952 v6(3448.88,1952) ; v6(3499,3675) 3542.17,3675 v6(3544.43,3677.26) C82.2@3544.43,3759.14 ; C81.2@3553.2,4269.99 v6(3553.2,4351.86)
  BottomLayer w6.5: v1@295.33,4240 v1(515,4240) v1(550,4240) ; v1(295.33,4267.92) 1160.64,4267.92 ; v1(295.47,4705.94) v1@1139.21,4705.94 ; v1(295.58,4734.58) v1@1139.31,4734.58 ; v1(295.92,3227.97) v1@1139.65,3227.97 ; v1(296.02,3256.61) v1@1139.76,3256.61 ; C45B.1@343.37,4345.99 343.37,4380.64 C46B.1@380.08,4417.35 ; C43B.1@343.37,4627.99 343.37,4593.33 C44B.1@380.08,4556.62 ; C45A.1@343.61,4812.65 343.61,4847.3 C46A.1@380.32,4884.01 ; C43A.1@343.61,5094.65 343.61,5059.99 C44A.1@380.32,5023.29 ; C45C.1@343.81,2868.02 343.81,2902.67 C46C.1@380.52,2939.38 ; C43C.1@343.81,3150.02 343.81,3115.36 C44C.1@380.52,3078.66 ; C45D.1@344.43,3335.99 344.43,3370.64 C46D.1@381.14,3407.35 ; C43D.1@344.43,3617.99 344.43,3583.33 C44D.1@381.14,3546.62 ; v1(403.61,3946.49) C4A.2@451.6,3946.49 ; C11A.1@439.45,3838.77 468.11,3838.77 v3(471.73,3835.14) ; C2A.1@439.83,4070.11 470.73,4070.11 v3(472.11,4071.49) ; C24A.1@439.83,4115.11 443.45,4118.73 v3(472.11,4118.73) ; C12A.2@453.17,3782.82 478.17,3782.82 v1(488.17,3792.82) ; C23A.2@456.11,4171.05 481.11,4171.05 v1(491.11,4161.05) 501.11,4171.05 C9A.2@526.11,4171.05 526.11,4216.11 v1(550,4240) ; v3(507.17,3835.14) 535.83,3835.14 C30A.1@539.45,3838.77 ; v3(507.17,3882.39) 508.54,3883.77 C3A.1@539.45,3883.77 ; v3(507.54,4118.73) 511.17,4115.11 C10A.1@539.83,4115.11 ; C29A.2@523.17,3782.82 498.17,3782.82 v1(488.17,3792.82) ; C1A.2@527.68,4007.38 v1(575.66,4007.38) ; 596.25,4708.94 v1(596.25,4627.99) C92B.2@629.86,4627.99 ; v1(596.5,5094.65) C92A.2@630.11,5094.65 ; 596.7,3230.97 v1(596.7,3150.02) C92C.2@630.31,3150.02 ; v1(597.31,3617.99) C92D.2@630.92,3617.99 ; v1(612.27,4379.19) U19B.3@612.27,4410.45 ; v1(612.51,4845.85) U19A.3@612.51,4877.11 ; v1(612.71,2901.22) U19C.3@612.71,2932.48 ; v1(613.33,3369.19) U19D.3@613.33,3400.45 ; C94B.2@696.86,4338.99 C90B.2@770.86,4338.99 ; C94A.2@697.11,4805.65 C90A.2@771.11,4805.65 ; C94C.2@697.31,2861.02 C90C.2@771.31,2861.02 ; C94D.2@697.92,3328.99 C90D.2@771.92,3328.99 ; v1@735.25,4265.92 v1@735.25,4336.99 ; v1@735.5,4732.58 v1@735.5,4803.65 ; 735.7,2787.95 v1@735.7,2859.02 ; v1@736.31,3255.92 v1@736.31,3326.99 ; v1@736.94,3256.61 v1@736.94,3327.68 ; v1(752.23,493.58) v1@1595.96,493.58 ; v1(752.33,522.22) v1@1596.06,522.22 ; v1(752.47,1534.56) 1617.78,1534.56 ; v1(752.61,1972.58) v1@1596.34,1972.58 ; v1(752.71,2001.22) v1@1596.45,2001.22 ; C45G.1@800.12,133.63 800.12,168.28 C46G.1@836.83,204.99 ; C43G.1@800.12,415.63 800.12,380.98 C44G.1@836.83,344.27 ; C45H.1@800.12,600.34 800.12,634.99 C46H.1@836.83,671.7 ; C43H.1@800.12,882.34 800.12,847.68 C44H.1@836.83,810.98 ; C45E.1@800.12,2080.34 800.12,2114.99 C46E.1@836.83,2151.7 ; C43E.1@800.12,2362.34 800.12,2327.68 C44E.1@836.83,2290.98 ; C45F.1@800.5,1612.63 800.5,1647.28 C46F.1@837.21,1683.99 ; C43F.1@800.5,1894.63 800.5,1859.98 C44F.1@837.21,1823.27 ; v1@815,3725 501.83,3725 488.17,3738.66 v1(488.17,3792.82) ; C88B.2@828.86,4629.99 C88B.2@829.86,4630.99 ; C88A.2@829.11,5096.65 C88A.2@830.11,5097.65 ; C88C.2@829.31,3152.02 C88C.2@830.31,3153.02 ; C88B.2@829.86,4638.99 v1@829.86,4668.99 ; C88D.2@829.92,3619.99 C88D.2@830.92,3620.99 ; C88A.2@830.11,5105.65 v1(830.11,5135.65) ; C88C.2@830.31,3161.02 v1(830.31,3191.02) ; C88D.2@830.92,3628.99 v1(830.92,3658.99) ; v1(843.3,1216.84) C4B.2@891.29,1216.84 ; v1@850.07,4377.08 v1(850.07,4379.99) U18B.3@850.07,4411.25 ; v1@850.31,4843.74 v1(850.31,4846.65) U18A.3@850.31,4877.91 ; v1@850.51,2899.11 v1(850.51,2902.02) U18C.3@850.51,2933.28 ; v1@851.13,3367.08 v1(851.13,3369.99) U18D.3@851.13,3401.25 ; C11B.1@879.14,1109.12 907.8,1109.12 v3(911.42,1105.5) ; C2B.1@879.52,1340.46 910.42,1340.46 v3(911.8,1341.84) ; C24B.1@879.52,1385.46 883.14,1389.08 v3(911.8,1389.08) ; C12B.2@892.86,1053.17 917.86,1053.17 v1(927.86,1063.17) ; C23B.2@895.8,1441.4 920.8,1441.4 v1(930.8,1431.4) 940.8,1441.4 C9B.2@965.8,1441.4 965.8,1486.46 v1(989.69,1510.35) ; v3(946.86,1105.5) 975.52,1105.5 C30B.1@979.14,1109.12 ; v3(946.86,1152.74) 948.23,1154.12 C3B.1@979.14,1154.12 ; v3(947.23,1389.08) 950.86,1385.46 C10B.1@979.52,1385.46 ; v1(954.69,1510.35) v1(989.69,1510.35) ; C29B.2@962.86,1053.17 937.86,1053.17 v1(927.86,1063.17) ; C1B.2@967.37,1277.74 v1(1015.35,1277.74) ; 1007.01,4240 v1(880,4240) v1(850,4240) v1(820.58,4240) v1(790,4240) v1(760,4240) v1(730,4240) v1(700,4240) v1(669.42,4240) v1(640,4240) v1(610,4240) v1(580,4240) v1(550,4240) ; 1053,496.58 v1(1053,415.63) C92G.2@1086.61,415.63 ; v1(1053,882.34) C92H.2@1086.61,882.34 ; v1(1053,2362.34) C92E.2@1086.61,2362.34 ; 1053.39,1975.58 v1(1053.39,1894.63) C92F.2@1087,1894.63 ; C83B.1@1059.86,4337.99 1068.65,4346.77 1068.65,4384.77 1087.86,4403.99 C80B.1@1100.49,4403.99 ; C83A.1@1060.11,4804.65 1068.9,4813.44 1068.9,4851.44 1088.11,4870.65 C80A.1@1100.74,4870.65 ; C83C.1@1060.31,2860.02 1069.1,2868.81 1069.1,2906.81 1088.31,2926.02 C80C.1@1100.94,2926.02 ; C83D.1@1060.92,3327.99 1069.71,3336.77 1069.71,3374.77 1088.92,3393.99 C80D.1@1101.55,3393.99 ; v1(1069.02,166.83) U19G.3@1069.02,198.09 ; v1(1069.02,633.54) U19H.3@1069.02,664.8 ; v1(1069.02,2113.54) U19E.3@1069.02,2144.8 ; v1(1069.4,1645.83) U19F.3@1069.4,1677.09 ; C96B.1@1086.86,4625.62 1124.07,4625.62 1140.08,4641.63 v1(1140.08,4643.63) ; C96A.1@1087.11,5092.29 1124.32,5092.29 1140.32,5108.29 v1(1140.32,5110.29) ; C96C.1@1087.31,3147.66 1124.52,3147.66 1140.52,3163.66 v1(1140.52,3165.66) ; C96D.1@1087.92,3615.62 1125.13,3615.62 1141.14,3631.63 v1(1141.14,3633.63) ; C40B.1@1091.23,4494.99 1113.44,4494.99 v1(1147.08,4528.62) ; C40A.1@1091.48,4961.65 1113.69,4961.65 v1(1147.32,4995.28) ; C40C.1@1091.68,3017.02 1113.89,3017.02 v1(1147.52,3050.65) ; C40D.1@1092.29,3484.99 1114.5,3484.99 v1(1148.14,3518.62) ; v1(1097.08,4437.63) 1097.08,4407.4 C80B.1@1100.49,4403.99 ; v1(1097.32,4904.29) 1097.32,4874.06 C80A.1@1100.74,4870.65 ; v1(1097.52,2959.66) 1097.52,2929.43 C80C.1@1100.94,2926.02 ; v1(1098.14,3427.63) 1098.14,3397.4 C80D.1@1101.55,3393.99 ; C80B.1@1102.49,4403.99 C80B.1@1100.49,4403.99 ; C80A.1@1102.74,4870.65 C80A.1@1100.74,4870.65 ; C80C.1@1102.94,2926.02 C80C.1@1100.94,2926.02 ; C80D.1@1103.55,3393.99 C80D.1@1101.55,3393.99 ; C94G.2@1153.61,126.63 C90G.2@1227.61,126.63 ; C94H.2@1153.61,593.34 C90H.2@1227.61,593.34 ; C94E.2@1153.61,2073.34 C90E.2@1227.61,2073.34 ; C94F.2@1154,1605.63 C90F.2@1228,1605.63 ; v1(1169.31,4072.87) 1217.3,4072.87 C34A.2@1223.11,4067.05 ; 1192,53.56 v1@1192,124.63 ; v1@1192,520.27 v1@1192,591.34 ; v1@1192,2000.27 v1@1192,2071.34 ; v1(1192.31,3856.33) 1218.02,3856.33 C35A.2@1225.11,3863.42 ; v1@1192.39,1532.56 v1(1192.39,1605.63) ; v1@1192.63,2001.22 v1@1192.63,2073.34 ; v1@1193.25,522.22 v1@1193.25,593.29 ; v1@1254.69,995.35 941.52,995.35 927.86,1009.02 v1(927.86,1063.17) ; C17A.1@1266.11,4097.68 1266.11,4085.22 v3(1278.46,4072.87) ; C15A.1@1269.11,3831.42 1278.46,3840.77 v3(1278.46,3856.33) ; C88G.2@1285.61,417.63 C88G.2@1286.61,418.63 ; C88H.2@1285.61,884.34 C88H.2@1286.61,885.34 ; C88E.2@1285.61,2364.34 C88E.2@1286.61,2365.34 ; C88F.2@1286,1896.63 C88F.2@1287,1897.63 ; C88G.2@1286.61,426.63 v1(1286.61,456.63) ; C88H.2@1286.61,893.34 v1(1286.61,923.34) ; C88E.2@1286.61,2373.34 v1(1286.61,2403.34) ; C88F.2@1287,1905.63 v1(1287,1935.63) ; C98B.1@1298.86,4585.99 1306.46,4593.59 v1(1344.03,4593.59) ; C98A.1@1299.11,5052.65 1306.71,5060.25 v1(1344.28,5060.25) ; C98C.1@1299.31,3108.02 1306.91,3115.62 v1(1344.48,3115.62) ; C98D.1@1299.92,3575.99 1307.52,3583.59 v1(1345.09,3583.59) ; R34B.1@1301.86,4411.99 1304.26,4414.39 v1(1340.69,4414.39) ; R34A.1@1302.11,4878.65 1304.51,4881.05 v1(1340.94,4881.05) ; R34C.1@1302.31,2934.02 1304.71,2936.42 v1(1341.14,2936.42) ; R34D.1@1302.92,3401.99 1305.32,3404.39 v1(1341.75,3404.39) ; v1@1306.82,164.72 v1(1306.82,167.63) U18G.3@1306.82,198.89 ; v1@1306.82,631.43 v1(1306.82,634.34) U18H.3@1306.82,665.6 ; v1@1306.82,2111.43 v1(1306.82,2114.34) U18E.3@1306.82,2145.6 ; v1@1307.2,1643.72 v1(1307.2,1646.63) U18F.3@1307.2,1677.89 ; C14A.1@1310.11,4097.68 1310.11,4084.53 v3(1321.77,4072.87) ; C16A.1@1312.11,3831.42 1321.77,3841.08 v3(1321.77,3856.33) ; v1(1344.03,4567.99) v1(1344.03,4593.59) ; v1(1344.28,5034.65) v1(1344.28,5060.25) ; v1(1344.48,3090.02) v1(1344.48,3115.62) ; v1(1345.09,3557.99) v1(1345.09,3583.59) ; C49B.1@1373.06,4579.79 C49B.1@1385.23,4579.79 ; C49A.1@1373.31,5046.45 C49A.1@1385.48,5046.45 ; C49C.1@1373.51,3101.82 C49C.1@1385.68,3101.82 ; C49D.1@1374.12,3569.79 C49D.1@1386.29,3569.79 ; C49B.1@1384.86,4593.59 v1(1344.03,4593.59) ; C49A.1@1385.11,5060.25 v1(1344.28,5060.25) ; C49C.1@1385.31,3115.62 v1(1344.48,3115.62) ; C49D.1@1385.92,3583.59 v1(1345.09,3583.59) ; v1(1394.6,4168.05) 1429.11,4133.55 C28A.2@1429.11,4127.05 1429.11,4093.6 v3(1408.38,4072.87) ; C48B.1@1418.86,4388.79 v1(1447.03,4388.79) ; C48A.1@1419.11,4855.45 v1(1447.27,4855.45) ; C48C.1@1419.31,2910.82 v1(1447.47,2910.82) ; C48D.1@1419.92,3378.79 v1(1448.09,3378.79) ; 1446.7,1510.35 v1(1319.69,1510.35) v1(1289.69,1510.35) v1(1260.27,1510.35) v1(1229.69,1510.35) v1(1199.69,1510.35) v1(1169.69,1510.35) v1(1139.69,1510.35) v1(1109.11,1510.35) v1(1079.69,1510.35) v1(1049.69,1510.35) v1(1019.69,1510.35) v1(989.69,1510.35) ; v3(1451.69,3986.25) 1458.3,3986.25 1470.11,3974.44 C19A.2@1488.11,3974.44 ; v1(1459.86,4439.82) C50B.1@1459.86,4467.99 ; v1(1460.11,4906.49) C50A.1@1460.11,4934.65 ; v1(1460.31,2961.86) C50C.1@1460.31,2990.02 ; v1(1460.86,4280.82) C47B.1@1460.86,4324.99 ; v1(1460.92,3429.82) C50D.1@1460.92,3457.99 ; v1(1461.11,4747.49) C47A.1@1461.11,4791.65 ; v1(1461.31,2802.86) C47C.1@1461.31,2847.02 ; v1(1461.92,3270.82) C47D.1@1461.92,3314.99 ; C83G.1@1516.61,125.63 1525.4,134.42 1525.4,172.42 1544.61,191.63 C80G.1@1557.24,191.63 ; C83H.1@1516.61,592.34 1525.4,601.13 1525.4,639.13 1544.61,658.34 C80H.1@1557.24,658.34 ; C83E.1@1516.61,2072.34 1525.4,2081.13 1525.4,2119.13 1544.61,2138.34 C80E.1@1557.24,2138.34 ; C83F.1@1517,1604.63 1525.79,1613.42 1525.79,1651.42 1545,1670.63 C80F.1@1557.63,1670.63 ; C96G.1@1543.61,413.27 1580.82,413.27 1596.83,429.27 v1(1596.83,431.27) ; C96H.1@1543.61,879.98 1580.82,879.98 1596.83,895.98 v1(1596.83,897.98) ; C96E.1@1543.61,2359.98 1580.82,2359.98 1596.83,2375.98 v1(1596.83,2377.98) ; C96F.1@1544,1892.27 1581.21,1892.27 1597.21,1908.27 v1(1597.21,1910.27) ; C40G.1@1547.98,282.63 1570.19,282.63 v1(1603.83,316.26) ; C40H.1@1547.98,749.34 1570.19,749.34 v1(1603.83,782.97) ; C40E.1@1547.98,2229.34 1570.19,2229.34 v1(1603.83,2262.97) ; C40F.1@1548.37,1761.63 1570.58,1761.63 v1(1604.21,1795.26) ; v1(1553.83,225.27) 1553.83,195.05 C80G.1@1557.24,191.63 ; v1(1553.83,691.98) 1553.83,661.76 C80H.1@1557.24,658.34 ; v1(1553.83,2171.98) 1553.83,2141.76 C80E.1@1557.24,2138.34 ; v1(1554.21,1704.27) 1554.21,1674.05 C80F.1@1557.63,1670.63 ; C80G.1@1559.24,191.63 C80G.1@1557.24,191.63 ; C80H.1@1559.24,658.34 C80H.1@1557.24,658.34 ; C80E.1@1559.24,2138.34 C80E.1@1557.24,2138.34 ; C80F.1@1559.63,1670.63 C80F.1@1557.63,1670.63 ; v1(1629,1343.22) 1676.99,1343.22 C34B.2@1682.8,1337.4 ; v1(1652,1126.68) 1677.71,1126.68 C35B.2@1684.8,1133.77 ; C17B.1@1725.8,1368.03 1725.8,1355.57 v3(1738.15,1343.22) ; C15B.1@1728.8,1101.77 1738.15,1111.13 v3(1738.15,1126.68) ; C98G.1@1755.61,373.63 1763.21,381.23 v1(1800.78,381.23) ; C98H.1@1755.61,840.34 1763.21,847.94 v1(1800.78,847.94) ; C98E.1@1755.61,2320.34 1763.21,2327.94 v1(1800.78,2327.94) ; C98F.1@1756,1852.63 1763.6,1860.23 v1(1801.17,1860.23) ; R34G.1@1758.61,199.63 1761.01,202.03 v1(1797.44,202.03) ; R34H.1@1758.61,666.34 1761.01,668.74 v1(1797.44,668.74) ; R34E.1@1758.61,2146.34 1761.01,2148.74 v1(1797.44,2148.74) ; R34F.1@1759,1678.63 1761.4,1681.03 v1(1797.83,1681.03) ; C14B.1@1769.8,1368.03 1769.8,1354.88 v3(1781.46,1343.22) ; C16B.1@1771.8,1101.77 1781.46,1111.43 v3(1781.46,1126.68) ; v1(1800.78,355.63) v1(1800.78,381.23) ; v1(1800.78,822.34) v1(1800.78,847.94) ; v1(1800.78,2302.34) v1(1800.78,2327.94) ; v1(1801.17,1834.63) v1(1801.17,1860.23) ; C49G.1@1829.81,367.43 C49G.1@1841.98,367.43 ; C49H.1@1829.81,834.14 C49H.1@1841.98,834.14 ; C49E.1@1829.81,2314.14 C49E.1@1841.98,2314.14 ; C49F.1@1830.2,1846.43 C49F.1@1842.37,1846.43 ; C49G.1@1841.61,381.23 v1(1800.78,381.23) ; C49H.1@1841.61,847.94 v1(1800.78,847.94) ; C49E.1@1841.61,2327.94 v1(1800.78,2327.94) ; C49F.1@1842,1860.23 v1(1801.17,1860.23) ; v1(1854.29,1438.4) 1888.8,1403.9 C28B.2@1888.8,1397.4 1888.8,1363.95 v3(1868.07,1343.22) ; C52B.2@1865.33,3784.89 v1(1865.33,3821.95) ; C52A.2@1866.63,5262.6 v1(1866.63,5299.66) ; C48G.1@1875.61,176.43 v1(1903.78,176.43) ; C48H.1@1875.61,643.14 v1(1903.78,643.14) ; C48E.1@1875.61,2123.14 v1(1903.78,2123.14) ; C48F.1@1876,1655.43 v1(1904.16,1655.43) ; v3(1911.38,1256.61) 1917.99,1256.61 1929.8,1244.8 C19B.2@1947.8,1244.8 ; v1(1916.61,227.47) C50G.1@1916.61,255.63 ; v1(1916.61,694.18) C50H.1@1916.61,722.34 ; v1(1916.61,2174.18) C50E.1@1916.61,2202.34 ; v1(1917,1706.47) C50F.1@1917,1734.63 ; v1(1917.61,68.47) C47G.1@1917.61,112.63 ; v1(1917.61,535.18) C47H.1@1917.61,579.34 ; v1(1917.61,2015.18) C47E.1@1917.61,2059.34 ; v1(1918,1547.47) C47F.1@1918,1591.63 ; U17A.4@1950,4531.3 2001,4531.3 2001,4531 v1(2012,4520) ; U17A.10@1950,4649.41 v1(2016,4649.41) ; U17A.15@1950,4747.83 v1(2016,4747.83) ; U17A.21@1950,4865.94 v1(2016,4865.94) ; U17B.4@1950.81,3054.64 2005.52,3054.64 2012.81,3047.34 v1(2012.81,3040.34) ; U17B.10@1950.81,3172.75 v1(2016.81,3172.75) ; U17B.15@1950.81,3271.17 v1(2016.81,3271.17) ; U17B.21@1950.81,3389.28 v1(2016.81,3389.28) ; R40A.1@1984,4212 2006.94,4212 v5(2024.71,4229.77) ; R40B.1@1984.81,2735.34 2007.76,2735.34 v5(2025.53,2753.11) ; C77B.1@2019.7,3660.53 v1(2056.77,3660.53) ; C77A.1@2021,5138.24 v1(2058.06,5138.24) ; v1(2169.43,4472.24) U17A.48@2235.43,4472.24 ; v1(2169.43,4531.3) U17A.45@2235.43,4531.3 ; v1(2169.43,4649.41) U17A.39@2235.43,4649.41 ; v1(2169.43,4747.83) U17A.34@2235.43,4747.83 ; v1(2169.43,4925) U17A.25@2235.43,4925 ; v1(2170.25,2995.58) U17B.48@2236.25,2995.58 ; v1(2170.25,3054.64) U17B.45@2236.25,3054.64 ; v1(2170.25,3172.75) U17B.39@2236.25,3172.75 ; v1(2170.25,3271.17) U17B.34@2236.25,3271.17 ; v1(2170.25,3448.34) U17B.25@2236.25,3448.34 ; v1(2173.43,4879.24) 2186.73,4865.94 U17A.28@2235.43,4865.94 ; v1(2174.25,3403.58) 2188.55,3389.28 U17B.28@2236.25,3389.28 ; v3(2215.64,5109.57) 2236.92,5130.86 C51A.1@2236.92,5143.58 ; v3(2216.45,3632.91) 2237.74,3654.2 C51B.1@2237.74,3666.92 ; C52D.2@2321.02,1049.24 v1(2321.02,1086.31) ; C52C.2@2321.02,2529.24 v1(2321.02,2566.31) ; U17D.4@2406.5,318.99 2457.21,318.99 v1(2468.5,307.69) ; U17D.10@2406.5,437.1 v1(2472.5,437.1) ; U17D.15@2406.5,535.53 v1(2472.5,535.53) ; U17D.21@2406.5,653.64 v1(2472.5,653.64) ; U17C.4@2406.5,1798.99 2461.21,1798.99 v1@2471,1789.19 ; U17C.10@2406.5,1917.1 v1(2472.5,1917.1) ; U17C.15@2406.5,2015.53 v1(2472.5,2015.53) ; U17C.21@2406.5,2133.64 v1(2472.5,2133.64) ; R40C.1@2440.5,1479.69 2463.45,1479.69 v5(2481.22,1497.46) ; C77D.1@2475.39,924.89 v1(2512.46,924.89) ; C77C.1@2475.39,2404.89 v1(2512.46,2404.89) ; v1(2625.94,259.93) U17D.48@2691.94,259.93 ; v1(2625.94,318.99) U17D.45@2691.94,318.99 ; v1(2625.94,437.1) U17D.39@2691.94,437.1 ; v1(2625.94,535.53) U17D.34@2691.94,535.53 ; v1(2625.94,712.69) U17D.25@2691.94,712.69 ; v1(2625.94,1739.93) U17C.48@2691.94,1739.93 ; v1(2625.94,1798.99) U17C.45@2691.94,1798.99 ; v1(2625.94,1917.1) U17C.39@2691.94,1917.1 ; v1(2625.94,2015.53) U17C.34@2691.94,2015.53 ; v1(2625.94,2192.69) U17C.25@2691.94,2192.69 ; v1(2629.94,665.93) 2642.24,653.64 U17D.28@2691.94,653.64 ; v1(2629.94,2145.93) 2642.24,2133.64 U17C.28@2691.94,2133.64 ; v3(2672.14,897.26) 2693.43,918.55 C51D.1@2693.43,931.27 ; v3(2672.14,2377.26) 2693.43,2398.55 C51C.1@2693.43,2411.27 ; R40D.1@2805.53,109.07 2805.53,86.13 v5(2823.3,68.36) ; v1(3321.37,768.91) U13.2@3321.37,725.43 3321.37,672.91 C58.2@3323.99,670.29 ; v1(3326.37,315.44) U16.2@3326.37,271.95 3326.37,219.44 C60.2@3328.99,216.82 ; C63.2@3326.37,443.91 U20.2@3326.37,503.91 v1(3326.37,547.4) ; v1(3357.99,1285.62) 3358.87,1286.5 C59B.1@3358.87,1312.21 ; v1(3357.99,2838) 3358.87,2838.88 C59A.1@3358.87,2864.58 ; C104.1@3486.98,3517.61 3509.98,3517.61 ; C99.2@3493,5259.37 v1(3493,5288.34) ; v1(3513,3545.2) 3513,3520.63 3509.98,3517.61 ; R68.2@3532.98,3517.61 3509.98,3517.61 ; R25.2@3641,5233.37 v1(3670.97,5233.37)
  BottomLayer w15: v5(1007.11,4043.05) 1045.83,4043.05 C6A.1@1050.11,4038.77 ; v5(1071.11,4156.77) 1072.11,4157.77 U1A.2@1072.11,4204.77 ; v5(1466.8,1313.4) 1505.52,1313.4 C6B.1@1509.8,1309.12 ; v5(1530.8,1427.12) 1531.8,1428.12 U1B.2@1531.8,1475.12 ; v5(2024.71,4229.77) C102A.1@2024.71,4276 ; v5(2025.53,2753.11) C102B.1@2025.53,2799.34 ; C55A.1@2104,4273 2104,4245 2116.38,4232.62 v5(2166.61,4232.62) ; C55B.1@2104.81,2796.34 2104.81,2768.34 2117.2,2755.95 v5(2167.43,2755.95) ; v5(2281.65,4307.34) R28A.1@2281.65,4339.99 ; C53A.1@2282,4251 2282,4203.96 v5(2282.78,4203.18) ; v5(2282.46,2830.68) R28B.1@2282.46,2863.32 ; C53B.1@2282.81,2774.34 2282.81,2727.3 v5(2283.59,2726.52) ; v5(2481.22,1497.46) C102C.1@2481.22,1543.69 ; C55C.1@2560.5,1540.69 2560.5,1512.69 2572.89,1500.31 v5@2619.12,1500.31 ; v5@2738.15,1575.04 R28C.1@2738.15,1607.68 ; C53C.1@2738.5,1518.69 2738.5,1471.65 v5(2739.28,1470.87) ; v5(2823.3,68.36) C102D.1@2869.53,68.36 ; v5(2826.14,-74.54) 2826.14,-23.31 2838.53,-10.93 C55D.1@2866.53,-10.93 ; R28D.1@3279.83,43.84 3368.46,43.84 C53D.1@3368.81,44.19 3415.85,44.19 v5(3416.63,44.97)
  BottomLayer w30: R51A.1@3685,2810 3685,2762.68 v6(3692.67,2755.01) v6(3692.67,2710)
  other v1: 1192,126.63 810.11,178.28 2556.94,266.93 810.11,370.98 1306.82,389.63 1566.54,493.34 1595.96,493.34 781.65,493.58 811.65,493.58 1007.23,493.58 1036.65,493.58 1066.65,493.58 1097.23,493.58 1126.65,493.58 1156.65,493.58 1187.23,493.58 1216.65,493.58 1246.65,493.58 1277.23,493.58 1306.65,493.58 1336.65,493.58 1376.97,494.01 1406.4,494.01 1436.4,494.01 1472.23,493.58 1501.65,493.58 1531.65,493.58 781.75,522.22 811.75,522.22 1007.33,522.22 1036.75,522.22 1066.75,522.22 1097.33,522.22 1126.75,522.22 1156.75,522.22 1187.33,522.22 1216.75,522.22 1246.75,522.22 1277.33,522.22 1306.75,522.22 1346.75,522.22 1472.33,522.22 1501.75,522.22 1531.75,522.22 1566.64,521.97 1596.06,521.97 1377.08,522.64 1406.5,522.64 1436.5,522.64 1192,593.34 810.11,644.99 2541.5,704.69 810.11,837.69 1306.82,856.34 959.69,995.35 989.69,995.35 1019.69,995.35 1049.11,995.35 1079.69,995.35 1109.69,995.35 1139.69,995.35 1169.11,995.35 1199.11,995.35 1229.11,995.35 1258.54,995.35 1854.29,1033.5 1358.69,1510.35 1388.11,1510.35 1418.11,1510.35 781.89,1534.56 811.89,1534.56 1007.47,1534.56 1036.89,1534.56 1066.89,1534.56 1097.47,1534.56 1126.89,1534.56 1156.89,1534.56 1187.47,1534.56 1216.89,1534.56 1246.89,1534.56 1277.47,1534.56 1306.89,1534.56 1344.89,1534.56 1377.22,1534.98 1406.64,1534.98 1436.64,1534.98 1472.47,1534.56 1501.89,1534.56 1531.89,1534.56 810.5,1657.28 2556.94,1747.93 810.5,1849.98 1307.2,1868.63 1566.92,1972.34 1596.34,1972.34 782.03,1972.58 812.03,1972.58 1007.61,1972.58 1037.03,1972.58 1067.03,1972.58 1097.61,1972.58 1127.03,1972.58 1157.03,1972.58 1187.61,1972.58 1217.03,1972.58 1247.03,1972.58 1277.61,1972.58 1307.03,1972.58 1337.03,1972.58 1377.36,1973.01 1406.78,1973.01 1436.78,1973.01 1472.61,1972.58 1502.03,1972.58 1532.03,1972.58 782.14,2001.22 812.14,2001.22 1007.71,2001.22 1037.14,2001.22 1067.14,2001.22 1097.71,2001.22 1127.14,2001.22 1157.14,2001.22 1187.71,2001.22 1217.14,2001.22 1247.14,2001.22 1277.71,2001.22 1307.14,2001.22 1347.14,2001.22 1472.71,2001.22 1502.14,2001.22 1532.14,2001.22 1567.02,2000.97 1596.45,2000.97 1377.46,2001.64 1406.88,2001.64 1436.88,2001.64 1192,2073.34 810.11,2124.99 2541.5,2185.69 810.11,2317.69 1306.82,2336.34 735.7,2861.02 353.81,2912.67 2101.25,3003.58 353.81,3105.37 850.51,3124.02 325.34,3227.97 355.34,3227.97 550.92,3227.97 580.34,3227.97 610.34,3227.97 640.92,3227.97 670.34,3227.97 700.34,3227.97 730.92,3227.97 760.34,3227.97 790.34,3227.97 820.92,3227.97 850.34,3227.97 880.34,3227.97 920.67,3228.39 950.09,3228.39 980.09,3228.39 1015.92,3227.97 1045.34,3227.97 1075.34,3227.97 1110.23,3227.72 1139.65,3227.72 1110.33,3256.36 1139.76,3256.36 325.45,3256.61 355.45,3256.61 551.02,3256.61 580.45,3256.61 610.45,3256.61 641.02,3256.61 670.45,3256.61 700.45,3256.61 731.02,3256.61 760.45,3256.61 790.45,3256.61 821.02,3256.61 850.45,3256.61 885.45,3256.61 920.77,3257.03 950.19,3257.03 980.19,3257.03 1016.02,3256.61 1045.45,3256.61 1075.45,3256.61 736.31,3328.99 354.42,3380.63 2085.81,3440.34 354.42,3573.34 851.13,3591.99 520,3725 550,3725 580,3725 609.42,3725 640,3725 670,3725 700,3725 729.42,3725 759.42,3725 789.42,3725 818.85,3725 295.58,4240 325,4240 919,4240 948.42,4240 978.42,4240 324.75,4267.92 354.75,4267.92 550.33,4267.92 579.75,4267.92 609.75,4267.92 640.33,4267.92 669.75,4267.92 699.75,4267.92 730.33,4267.92 759.75,4267.92 789.75,4267.92 820.33,4267.92 849.75,4267.92 889.75,4267.92 920.08,4268.34 949.5,4268.34 979.5,4268.34 1015.33,4267.92 1044.75,4267.92 1074.75,4267.92 735.25,4338.99 353.36,4390.63 2100.43,4480.24 353.36,4583.34 829.86,4666.99 324.9,4705.94 354.9,4705.94 550.47,4705.94 579.9,4705.94 609.9,4705.94 640.47,4705.94 669.9,4705.94 699.9,4705.94 730.47,4705.94 759.9,4705.94 789.9,4705.94 820.47,4705.94 849.9,4705.94 879.9,4705.94 920.22,4706.36 949.65,4706.36 979.65,4706.36 1015.47,4705.94 1044.9,4705.94 1074.9,4705.94 1109.78,4705.69 1139.21,4705.69 1109.89,4734.33 1139.31,4734.33 325,4734.58 355,4734.58 550.58,4734.58 580,4734.58 610,4734.58 640.58,4734.58 670,4734.58 700,4734.58 730.58,4734.58 760,4734.58 790,4734.58 820.58,4734.58 850,4734.58 890,4734.58 920.32,4735 949.75,4735 979.75,4735 1015.58,4734.58 1045,4734.58 1075,4734.58 735.5,4805.65 353.61,4857.3 2085,4917 353.61,5050
  other v3: 856.99,256.91 904.24,256.91 856.99,292.35 904.24,292.35 856.99,723.62 904.24,723.62 856.99,759.06 904.24,759.06 1824.77,1126.68 1868.07,1126.68 1911.38,1126.68 929.14,1129.12 911.42,1152.74 1738.15,1169.99 1781.46,1169.99 1824.77,1169.99 1868.07,1169.99 1911.38,1169.99 1738.15,1213.3 1781.46,1213.3 1824.77,1213.3 1868.07,1213.3 1911.38,1213.3 1738.15,1256.61 1781.46,1256.61 1824.77,1256.61 1868.07,1256.61 1738.15,1299.91 1781.46,1299.91 1824.77,1299.91 1868.07,1299.91 1911.38,1299.91 947.23,1341.84 1824.77,1343.22 1911.38,1343.22 929.52,1365.46 857.38,1735.91 904.62,1735.91 857.38,1771.35 904.62,1771.35 856.99,2203.62 904.24,2203.62 856.99,2239.06 904.24,2239.06 400.69,2991.3 447.93,2991.3 400.69,3026.73 447.93,3026.73 401.3,3459.27 448.55,3459.27 401.3,3494.7 448.55,3494.7 1365.08,3856.33 1408.38,3856.33 1451.69,3856.33 489.45,3858.77 471.73,3882.39 1278.46,3899.64 1321.77,3899.64 1365.08,3899.64 1408.38,3899.64 1451.69,3899.64 1278.46,3942.95 1321.77,3942.95 1365.08,3942.95 1408.38,3942.95 1451.69,3942.95 1278.46,3986.25 1321.77,3986.25 1365.08,3986.25 1408.38,3986.25 1278.46,4029.56 1321.77,4029.56 1365.08,4029.56 1408.38,4029.56 1451.69,4029.56 507.54,4071.49 1365.08,4072.87 1451.69,4072.87 489.83,4095.11 400.24,4469.27 447.49,4469.27 400.24,4504.7 447.49,4504.7 400.49,4935.93 447.73,4935.93 400.49,4971.36 447.73,4971.36
  other v5: 3312.47,43.84 2622.12,1500.31 2737.15,1575.04
I2C.RESET: P1.H22 U8A.16 U8B.16 U8C.16 U8D.16 | length 266.3
  TopLayer w5: v2(2498.84,4134.33) 2511.34,4121.83 2511.34,4084.33 P1.H22@2536.34,4059.33
  TopLayer w6.5: U8A.16@2186.11,5168.63 v1(2186.11,5212.57) ; U8B.16@2186.93,3691.97 v1(2186.93,3735.91) ; U8D.16@2642.62,956.32 v1(2642.62,1000.26) ; U8C.16@2642.62,2436.32 v1(2642.62,2480.26)
I2C.SCL: P1.C30 U8A.12 U8B.12 U8C.12 U8D.12 U15.6 | length 293.3
  TopLayer w5: v2(2748.84,4534.33) 2761.34,4521.83 2761.34,4484.33 P1.C30@2786.34,4459.33
  TopLayer w6.5: U8A.12@2274.69,5139.1 v1(2308.63,5139.1) ; U8B.12@2275.51,3662.44 v1(2309.45,3662.44) ; U8D.12@2731.2,926.79 v1(2765.14,926.79) ; U8C.12@2731.2,2406.79 v1(2766.14,2406.79)
  TopLayer w10: v1(3527.03,5144) U15.6@3593,5144
MB2V5P: C85A.1 C85B.1 C85C.1 C85D.1 C87A.1 C87B.1 C87C.1 C87D.1 C114A.2 C114B.2 C114C.2 C114D.2 C115A.2 C115B.2 C115C.2 C115D.2 U17A.1 U17A.24 U17A.31 U17A.42 U17B.1 U17B.24 U17B.31 U17B.42 U17C.1 U17C.24 U17C.31 U17C.42 U17D.1 U17D.24 U17D.31 U17D.42 | length 1786
  TopLayer w6.5: v1(2084.93,4769) C114A.2@2084.93,4807.02 2089.93,4812.02 C115A.2@2149.93,4812.02 2173.43,4812.02 ; v1(2085.74,3290.34) C114B.2@2085.74,3330.36 2090.74,3335.36 C115B.2@2150.74,3335.36 2174.25,3335.36 ; v1(2169.43,4590.35) 2179.42,4580.37 C87A.1@2202,4580.37 ; v1(2170.25,3113.69) 2180.23,3103.71 C87B.1@2202.81,3103.71 ; v1(2173.43,4783.24) 2173.43,4812.02 ; v1(2174.25,3308.58) 2174.25,3335.36 ; C85A.1@2196.93,4812.02 2173.43,4812.02 ; C85B.1@2197.75,3335.36 2174.25,3335.36 ; v1(2541.43,554.69) C114D.2@2541.43,594.71 2546.43,599.71 C115D.2@2606.43,599.71 2629.94,599.71 ; v1(2541.43,2034.69) C114C.2@2541.43,2074.71 2546.43,2079.71 C115C.2@2606.43,2079.71 2629.94,2079.71 ; v1(2625.94,378.05) 2635.92,368.06 C87D.1@2658.5,368.06 ; v1(2625.94,1858.05) 2635.92,1848.06 C87C.1@2658.5,1848.06 ; v1(2629.94,570.93) 2629.94,599.71 ; v1@2629.94,2055.93 2629.94,2079.71 ; C85D.1@2653.44,599.71 2629.94,599.71 ; C85C.1@2653.44,2079.71 2629.94,2079.71
  BottomLayer w6.5: U17A.1@1950,4472.24 v1(2016,4472.24) ; U17A.24@1950,4925 v1(1950,4949) ; U17B.1@1950.81,2995.58 v1(2016.81,2995.58) ; U17B.24@1950.81,3448.34 v1(1950.81,3472.34) ; v1(2169.43,4590.35) U17A.42@2235.43,4590.35 ; v1(2170.25,3113.69) U17B.42@2236.25,3113.69 ; v1@2172.75,3310.08 2192.89,3330.23 U17B.31@2236.25,3330.23 ; v1(2173.43,4783.24) 2173.43,4788.24 2192.08,4806.89 U17A.31@2235.43,4806.89 ; U17D.1@2406.5,259.93 v1(2472.5,259.93) ; U17D.24@2406.5,712.69 v1(2406.5,736.69) ; U17C.1@2406.5,1739.93 v1(2472.5,1739.93) ; U17C.24@2406.5,2192.69 v1(2406.5,2216.69) ; v1(2625.94,378.05) U17D.42@2691.94,378.05 ; v1(2625.94,1858.05) U17C.42@2691.94,1858.05 ; v1(2629.94,570.93) 2629.94,575.93 2648.58,594.58 U17D.31@2691.94,594.58 ; v1(2629.94,2051.93) 2652.58,2074.58 U17C.31@2691.94,2074.58
MEZZPOWERENABLE: U1A.3 U1B.3 U10A.3 U10B.3 U10C.3 U10D.3 U11A.6 U11B.6 U11C.6 U11D.6 | length 481.9
  TopLayer w15: U11A.6@2104.38,4282.62 v5(2166.61,4282.62) ; U11B.6@2105.19,2805.95 v5(2167.43,2805.95) ; v5(2320.28,4203.18) U10A.3@2320.28,4261.42 ; v5(2321.09,2726.52) U10B.3@2321.09,2784.76 ; U11C.6@2560.88,1550.31 v5(2622.12,1550.31) ; v5(2776.78,1470.87) U10C.3@2776.78,1529.11 ; v5@2876.14,-69.54 U11D.6@2876.14,-6.31 ; U10D.3@3358.39,82.47 v5(3416.63,82.47)
  other v5: 2876.14,-74.54
MGT0_CLK_M2C_N: P1.D5 | length 30.2
  TopLayer w6.5: v2(2711.34,3196.83) 2723.84,3196.83 P1.D5@2736.34,3209.33
MGT0_CLK_M2C_P: P1.D4 | length 30.2
  TopLayer w6.5: v2(2711.34,3171.83) 2723.84,3171.83 P1.D4@2736.34,3159.33
MGT0_D_C2M_N: P1.C3 | length 30.2
  TopLayer w6.5: v2(2761.34,3096.83) 2773.84,3096.83 P1.C3@2786.34,3109.33
MGT0_D_C2M_P: P1.C2 | length 30.2
  TopLayer w6.5: v2(2761.34,3071.83) 2773.84,3071.83 P1.C2@2786.34,3059.33
MGT0_D_M2C_N: P1.C7 | length 30.2
  TopLayer w6.5: v2(2761.34,3296.83) 2773.84,3296.83 P1.C7@2786.34,3309.33
MGT0_D_M2C_P: P1.C6 | length 30.2
  TopLayer w6.5: v2(2761.34,3271.83) 2773.84,3271.83 P1.C6@2786.34,3259.33